# Altium PCB TPS54531_V3.PcbDoc
Units mil, origin at the board's own origin, x right, y up, seen from the top; angles counter-clockwise.
Board outline 1035 x 715 mil, 2 copper layers (Top Layer, Bottom Layer); 21 components, 10 nets, 49 pads, 49 vias.
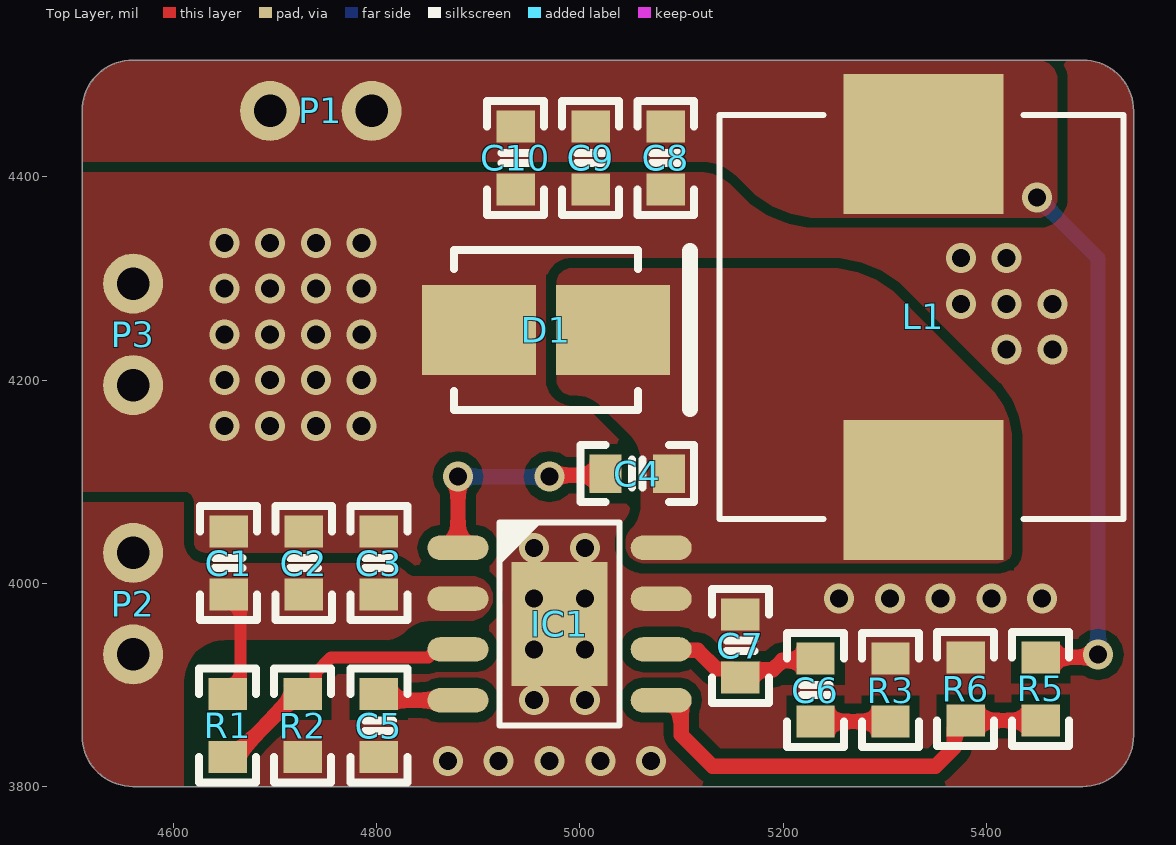
[diagram p0: Top Layer view]
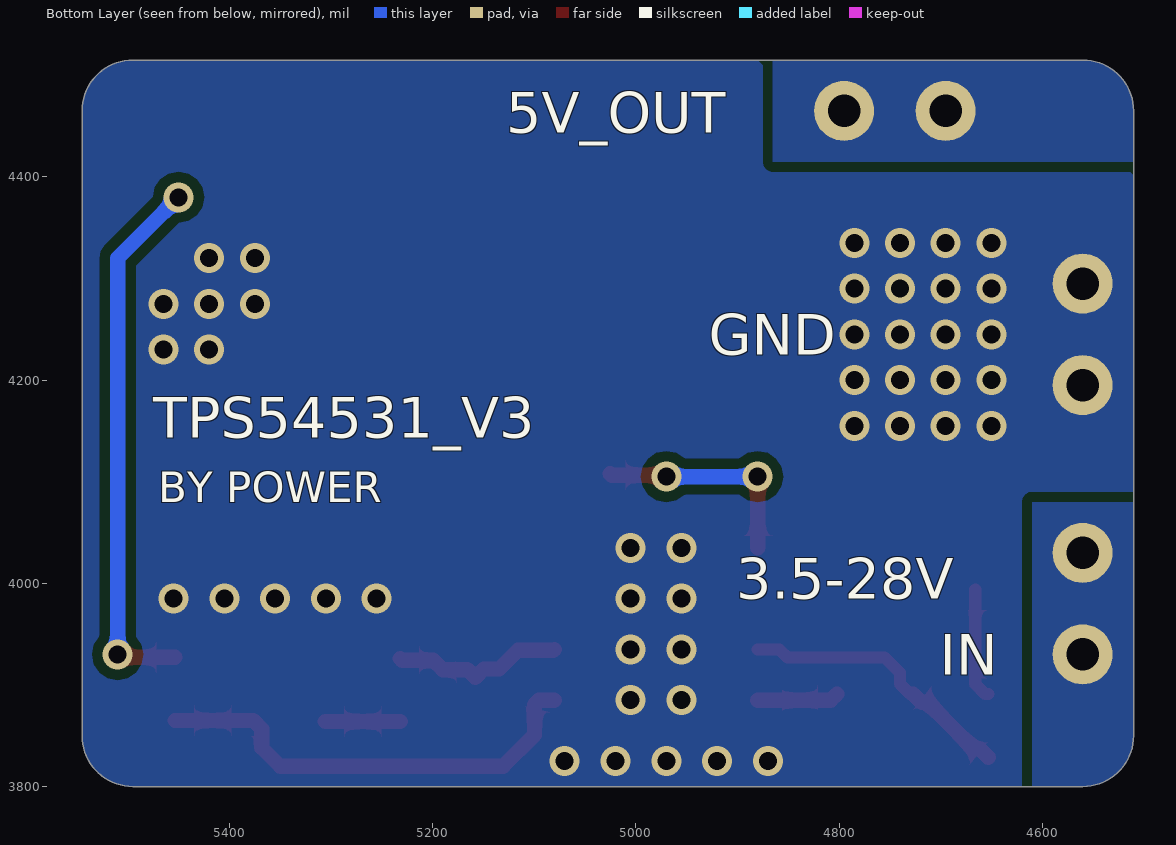
[diagram p1: Bottom Layer view, seen from below]
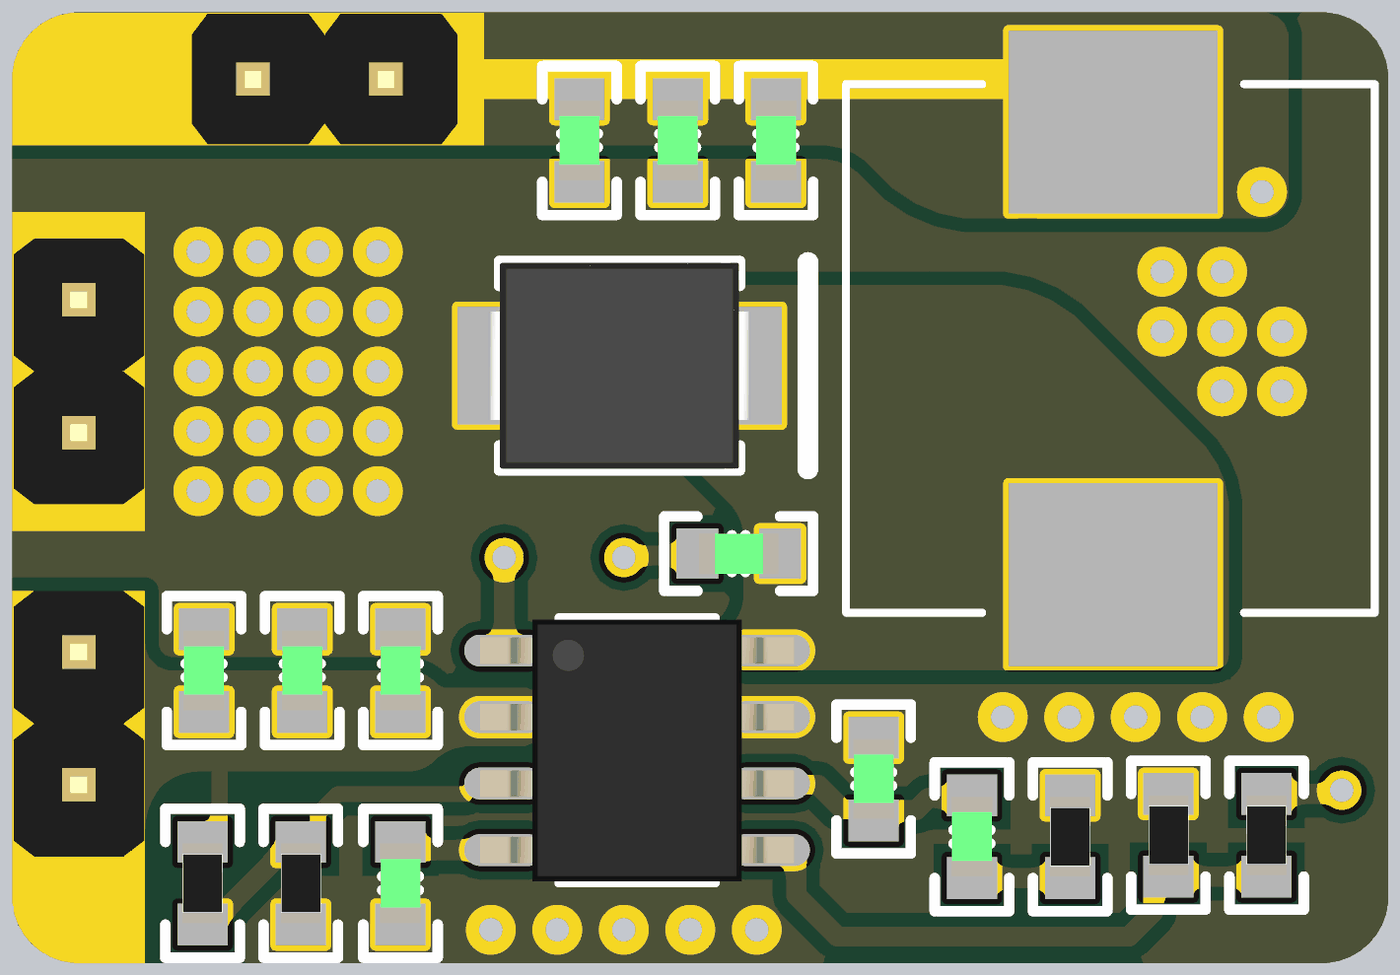
[diagram p2: 3D render of the assembled board from above, using the file's embedded part models]

## Layer stack, top to bottom
Top Solder: solder mask 0.4, Solder Resist, Dk 3.5
Top Layer: signal copper 1.4
Dielectric 1: dielectric 12.6, FR-4, Dk 4.8
Bottom Layer: signal copper 1.4
Bottom Solder: solder mask 0.4, Solder Resist, Dk 3.5

## Board outline
4510,3850 ccw(c4560,3850) 4560,3800 5495,3800 ccw(c5495,3850) 5545,3850 5545,4465 ccw(c5495,4465) 5495,4515 4560,4515 ccw(c4560,4465) 4510,4465

## Design rules (kind name [scope] priority, off if disabled: settings)
Clearance [All] p1: gap=10 ignorepadtopadclearanceinfootprint=FALSE except(0: Arc-Hole Track-Hole SMDPad-Hole THPad-Hole Via-Hole Fill-Hole Poly-Hole Region-Hole Text-Hole)
PlaneConnect [All] p1: planeconnectstyle=Direct reliefexpansion=20 reliefentries=4 reliefconductorwidth=10 reliefairgap=10
PolygonConnect [All] p1: connectstyle=Direct reliefconductorwidth=10 reliefentries=4 polygonreliefangle="90 Angle" airgapwidth=10
RoutingVias [All] p1: holewidth=17.72 width=29.53 viastyle="Through Hole" minholewidth=17.72 minwidth=29.53 maxholewidth=17.72 maxwidth=29.53
SolderMaskExpansion [All] p1: expansion=4 istentingtop=FALSE
Width [All] p1: maxlimit=100 minlimit=10 preferedwidth=15
29 further rules are at their usual default settings.

## Components (designator, comment, footprint, x,y, rotation, side; value= is the part's Value field where it differs from the comment)
C1 "4.7uF" CAP-0603 4654.28,4020 r270 top
C2 "4.7uF" CAP-0603 4728.17,4020 r270 top
C3 "100nF" CAP-0603 4802.05,4020 r270 top
C4 "100nF" CAP-0603 5056.44,4107.95 r0 top
C5 "10nF" CAP-0603 4802.05,3860 r90 top
C6 "2200pF" CAP-0603 5231.83,3895 r90 top
C7 "22pF" CAP-0603 5157.95,3938.42 r270 top
C8 "47uF" CAP-0603 5084.44,4418.66 r90 top
C9 "47uF" CAP-0603 5010.55,4418.66 r90 top
C10 "100nF" CAP-0603 4936.67,4418.66 r90 top
D1 "SS54" DO-214AA/SMB 4966.77,4249.3 r180 top
IC1 "TPS54531DDA" SOIC_8_PAD 4980,3960 r270 top locked
L1 "4.7uH 5A" L-10040 5338,4262.31 r90 top locked
P1 "HDR1x2_2.54" HDR1X2_2.54_180 4695,4465 r90 top
P2 "HDR1x2_2.54" HDR1X2_2.54_180 4560.22,4030 r0 top
P3 "HDR1x2_2.54" HDR1X2_2.54_180 4560.22,4295 r0 top
R1 "665k" R-0603 4653.17,3860 r90 top
R2 "130k" R-0603 4727.05,3860 r90 top
R3 "37.4k" R-0603 5305.72,3895 r270 top
R5 "10.2k" R-0603 5453.48,3896.1 r90 top
R6 "1.96k" R-0603 5379.6,3896.1 r270 top

## Footprints (in the part's own frame and the unit in brackets; to place one, negate y for a bottom-side part, rotate by r counter-clockwise, add the part's x,y. Pads: shape width x height; smd on the part's side, far side on the other; paste and mask are expansions set on the pad)
CAP-0603 [mm]
  rect 0.8x0.96 smd: 1(-0.79,0) 2(0.79,0)
  silkscreen extent -1.42,-0.71 1.42,0.71, body extent -0.76,-0.39 0.76,0.39, height 0.9
DO-214AA/SMB [mm]
  rect 2.85x2.25 smd: 1(1.675,0) 2(-1.675,0)
  silkscreen extent -3.6,-2 2.3,2, body extent -2.5,-1.97 2.5,1.97, height 2.44
HDR1X2_2.54_180 [mm]
  round 1.5 hole 0.813: 1(0,0) 2(0,-2.54)
  body extent -1.25,-3.81 1.25,1.27, height 8.2
L-10040 [mm] "10.1*11.6*4.0MM(长*宽*高)"
  rect 3.5x4 smd: 1(-4.326,0) 2(4.326,0)
  silkscreen extent -5.05,-5 5.05,5.1, body extent -5,-5 5,5.08, height 4
R-0603 [mm]
  rect 0.8x0.96 smd: 1(-0.79,0) 2(0.79,0)
  silkscreen extent -1.42,-0.71 1.42,0.71, body extent -0.76,-0.38 0.76,0.38, height 0.41
SOIC_8_PAD [mil]
  oval 24x60 smd: 1(-75,-100) 2(-25,-100) 3(25,-100) 4(75,-100) 5(75,100) 6(25,100) 7(-25,100) 8(-75,100)
  rect 122.05x94.49 smd: 9(0,0)
  silkscreen extent -100,-59 100,59, body extent -98,-118 98,118, height 71

## Part data
C1 C2 C3 C4 C5 C6 C7 C8 C9 C10: library part CAP, "贴片电容", Package=0402, SuppliersPartNumber=C52923, ComponentLink1Description=供应商链接, ComponentLink1URL=http://www.szlcsc.com/product/details_53938.html, Supplier=LC
D1: library part DIODE, "肖特基二极管", Package=SMA(DO-214AC), SuppliersPartNumber=C22452, ComponentLink1Description=供应商链接, ComponentLink1URL=http://www.szlcsc.com/product/details_23178.html, Supplier=LC
IC1: "集成稳压芯片", Manufacturer_Name="Texas Instruments", Mouser Part Number=595-TPS54531DDA, Arrow Part Number=TPS54531DDA, Arrow Price/Stock=https://www.arrow.com/en/products/tps54531dda/texas-instruments, Datasheet Link=http://www.ti.com/lit/gpn/tps54531, Height=1.7mm, Manufacturer_Part_Number=TPS54531DDA, Mouser Price/Stock=https://www.mouser.co.uk/ProductDetail/Texas-Instruments/TPS54531DDA?qs=jA5Ki6243omoJVKISZs%2FBg%3D%3D
L1: library part INDUCTOR, "电感", Package=0402, SuppliersPartNumber=C32041, ComponentLink1Description=供应商链接, ComponentLink1URL=http://www.szlcsc.com/product/details_33003.html, Supplier=LC
P1 P2 P3: "Header"
R1 R2 R3 R5 R6: library part RES, "贴片电阻", Package=0805, SuppliersPartNumber=C17798, Supplier=LC

## Via types
v1: diameter 29.53, hole 17.72, Top Layer to Bottom Layer, 49 vias

## Nets (pads, with @x,y where several pads share a name; then routed paths per layer and width w, separated by ;. In a path a pad name is that pad's centre, name@x,y a point inside that pad or via, vN(x,y) a via of type N, cw(c..) or ccw(c..) an arc to the next point about the centre after c; other vN are vias at no path point)
5V: C8.2 C9.2 C10.2 L1.2 P1.1 P1.2 R5.2 | length 532.1
  Top Layer w15: R5.2 5503.25,3927.2 ccw(c5503.25,3936.75) v1(5510,3930)
  Bottom Layer w15: v1(5450,4380) 5510,4320 v1(5510,3930)
GND: C1.1 C2.1 C3.1 C5.1 C7.1 C8.1 C9.1 C10.1 D1.1 IC1.7 IC1.9 P3.1 P3.2 R2.1 R3.1 R6.1
  other v1: 4870,3825 4920,3825 4970,3825 5020,3825 5070,3825 4955,3885 5005,3885 4955,3935 5005,3935 4955,3985 5005,3985 5255,3985 5305,3985 5355,3985 5405,3985 5455,3985 4955,4035 5005,4035 4650,4155 4695,4155 4740,4155 4785,4155 4650,4200 4695,4200 4740,4200 4785,4200 5420,4230 5465,4230 4650,4245 4695,4245 4740,4245 4785,4245 5375,4275 5420,4275 5465,4275 4650,4290 4695,4290 4740,4290 4785,4290 5375,4320 5420,4320 4650,4335 4695,4335 4740,4335 4785,4335
NetC4_1: C4.1 IC1.1 | length 216.6
  Top Layer w15: IC1.1 v1(4880,4105) ; v1(4970,4105) 4971.47,4106.47 5023.86,4106.47 C4.1
  Bottom Layer w15: v1(4880,4105) v1(4970,4105)
NetC4_2: C4.2 D1.2 IC1.8 L1.1
NetC5_2: C5.2 IC1.4 | length 80.5
  Top Layer w15: C5.2 4808.16,3885 IC1.4
NetC6_1: C6.1 R3.2 | length 73.9
  Top Layer w15: C6.1 R3.2
NetC6_2: C6.2 C7.2 IC1.6 | length 171.1
  Top Layer w15: IC1.6 5080.9,3934.1 5115.9,3934.1 5134.44,3915.56 5149.7,3915.56 C7.2 5165.63,3915 5190,3915 5199.22,3924.22 5229.95,3924.22 C6.2
NetIC1_3: IC1.3 R1.1 R2.2 | length 277.3
  Top Layer w12: R2.2 4730.2,3891.1 4739.95,3900.85 4739.95,3911.95 4755,3927 4850.75,3927 4858.75,3935 IC1.3
  Top Layer w15: R1.1 4661.42,3837.15 4667.15,3837.15 4712.85,3882.85 4718.8,3882.85 R2.2
NetIC1_5: IC1.5 R5.1 R6.2 | length 447.5
  Top Layer w15: IC1.5 5095.56,3885 5099.72,3880.84 5099.72,3850.84 5130.56,3820 5350,3820 5368.2,3838.2 5368.2,3856.75 5376.45,3865 R6.2 R5.1
VM: C1.2 C2.2 C3.2 IC1.2 P2.1 P2.2 R1.2 | length 110
  Top Layer w12: R1.2 4656.25,3891.1 4666,3900.85 C1.2@4666,3994

## Polygon pours and split planes (outlines as drawn)
NetC4_2 on Top Layer "NONET_L01_P-001" (solid, pour order 2): 4992.07,4310 ccw(c4992.07,4295) 4977.07,4295 4977.07,4200.68 ccw(c4992.63,4200.68) 4992.63,4185.12 ccw(c4994.99,4208.95) 4995,4185 cw(c4995,4148.79) 5020.61,4174.39 5049.39,4145.61 cw(c5023.79,4120) 5060,4120 5060,4076.54 cw(c5028.06,4076.54) 5050.64,4053.95 ccw(c5064.26,4040.33) 5045,4040.33 5045,4036.77 ccw(c5061.11,4036.77) 5049.72,4025.38 ccw(c5062.71,4038.37) 5062.71,4020 5410.33,4020 ccw(c5410.33,4038.9) 5423.7,4025.54 ccw(c5407.95,4032.07) 5425,4032.07 5425,4140 ccw(c5350.41,4140) 5403.15,4192.75 5315.19,4280.71 ccw(c5244.48,4210) 5244.48,4310
GND on Top Layer "NONET_L01_P-001" (solid, remove dead copper, pour order 8): 4510,3850 ccw(c4560,3850) 4560,3800 5495,3800 ccw(c5495,3850) 5545,3850 5545,4465 ccw(c5495,4465) 5495,4515 4560,4515 ccw(c4560,4465) 4510,4465
VM on Top Layer "NONET_L01_P-001" (solid, pour order 4): 4621.51,3932.16 cw(c4650.09,3903.58) 4650.09,3944 4807.48,3944 ccw(c4807.48,3973.02) 4828,3952.5 cw(c4853.35,3927.15) 4853.35,3963 4891,3963 ccw(c4891,3986) 4914,3986 ccw(c4893,3986) 4893,4007 4837.24,4007 cw(c4837.24,4017.24) 4830,4010 ccw(c4805.86,3985.86) 4805.86,4020 4630,4020 cw(c4630,4040) 4610,4040 4610,4080 4510,4080 4510,3850 ccw(c4560,3850) 4560,3800 4610,3800 4610,3900 cw(c4660.7,3900)
5V on Top Layer "NONET_L01_P-001" (solid, pour order 3): 5450,4360 ccw(c5450,4380) 5470,4380 5470,4495 ccw(c5450,4495) 5450,4515 4560,4515 ccw(c4560,4465) 4510,4465 4510,4415 5118.79,4415 cw(c5118.79,4363.79) 5155,4400 5165.71,4389.29 ccw(c5236.42,4460) 5236.42,4360
no net on Top Solder "NONET_L01_P-001" (solid): 5262.5,4450 5262.5,4480 4847.5,4480 4847.5,4450
no net on Top Solder "NONET_L01_P-001" (solid): 4625,4514.78 4559.78,4514.78 ccw(c4559.78,4465) 4510,4465 4510,4415 4625,4414.78 4865,4414.78 4865,4514.78
no net on Top Solder "NONET_L01_P-001" (solid): 4610,4125 4510,4125 4510,4365 4610,4365
no net on Top Solder "NONET_L01_P-001" (solid): 4610,3800 4560,3800 cw(c4560,3850) 4510,3850 4510,4080 4610,4080
no net on Bottom Solder "NONET_L01_P-001" (solid): 4610,3800 4560,3800 cw(c4560,3850) 4510,3850 4510,4080 4610,4080
no net on Bottom Solder "NONET_L01_P-001" (solid): 4610,4125 4510,4125 4510,4365 4610,4365
no net on Bottom Solder "NONET_L01_P-001" (solid): 4625,4514.78 4559.78,4514.78 ccw(c4559.78,4465) 4510,4465 4510,4415 4625,4414.78 4865,4414.78 4865,4514.78
5V on Bottom Layer "NONET_L01_P-001" (solid, pour order 6): 4625,4514.78 4559.78,4514.78 ccw(c4559.78,4465) 4510,4465 4510,4415 4625,4414.78 4865,4414.78 4865,4514.78
VM on Bottom Layer "NONET_L01_P-001" (solid, pour order 5): 4610,3800 4560,3800 cw(c4560,3850) 4510,3850 4510,4080 4610,4080
GND on Bottom Layer "NONET_L01_P-001" (solid, remove dead copper, pour order 7): 4510,3850 ccw(c4560,3850) 4560,3800 5495,3800 ccw(c5495,3850) 5545,3850 5545,4465 ccw(c5495,4465) 5495,4515 4560,4515 ccw(c4560,4465) 4510,4465

## Silkscreen, mask and mechanical layers (free items; w line width, h text height)
Bottom Overlay:
  text "5V_OUT" at 5127.66,4443.34 h40
  text "GND" at 4928.32,4225.01 h40
  text "TPS54531_V3" at 5474.93,4143.34 h40
  text "BY POWER" at 5469.96,4080 h30
  text "3.5-28V" at 4900.98,3985.01 h40
  text "IN" at 4701.05,3910.01 h40
Mechanical 1:
  lines w6: 4510,3850 ccw(c4560,3850) 4560,3800 5495,3800 ccw(c5495,3850) 5545,3850 5545,4050 5545,4465 ccw(c5495,4465) 5495,4515 4560,4515 ccw(c4560,4465) 4510,4465 4510,4445 4510,3850